# EAGLE board PCB_Ceas (EAGLE 9.7.0)
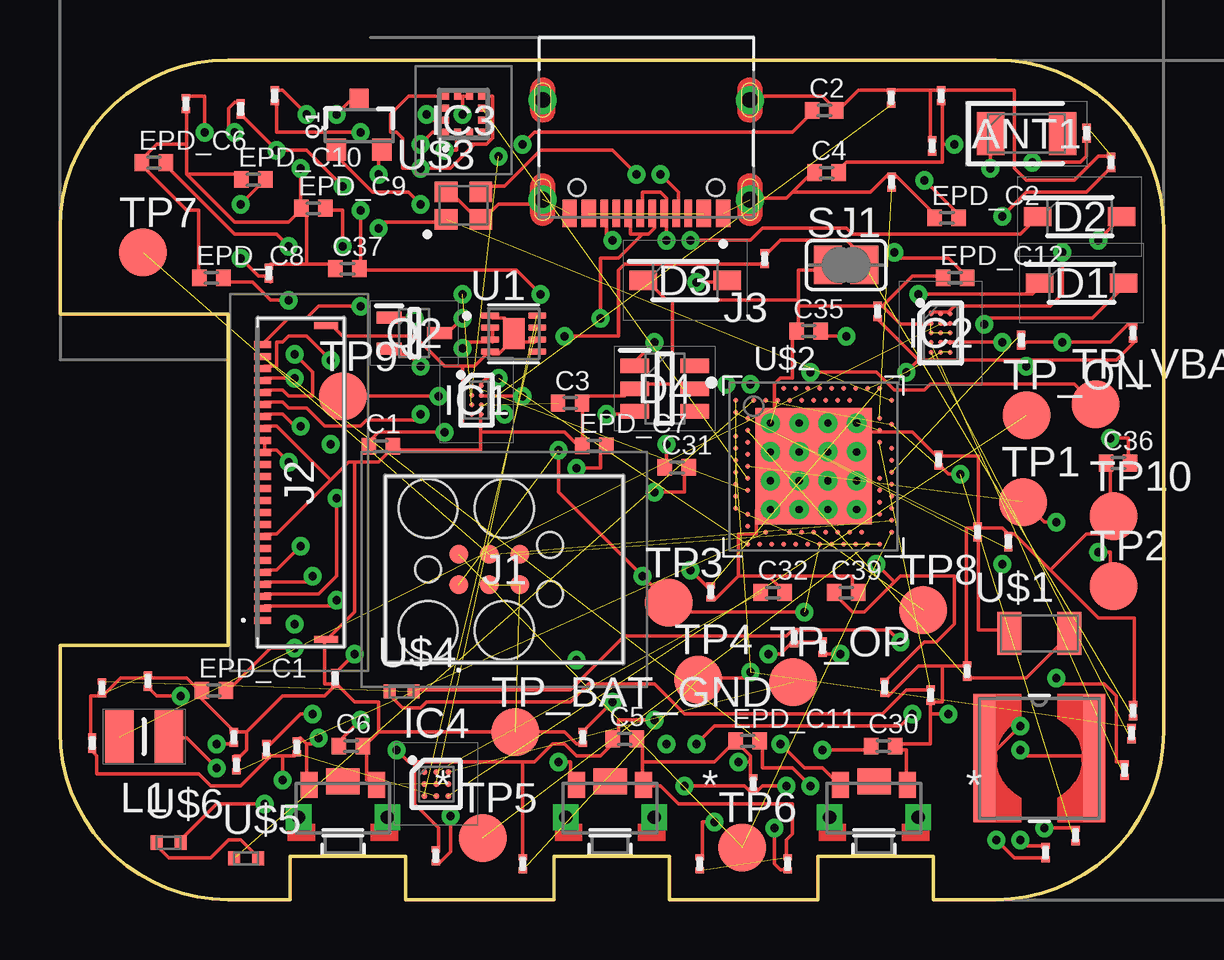
[diagram p0: board, top side]
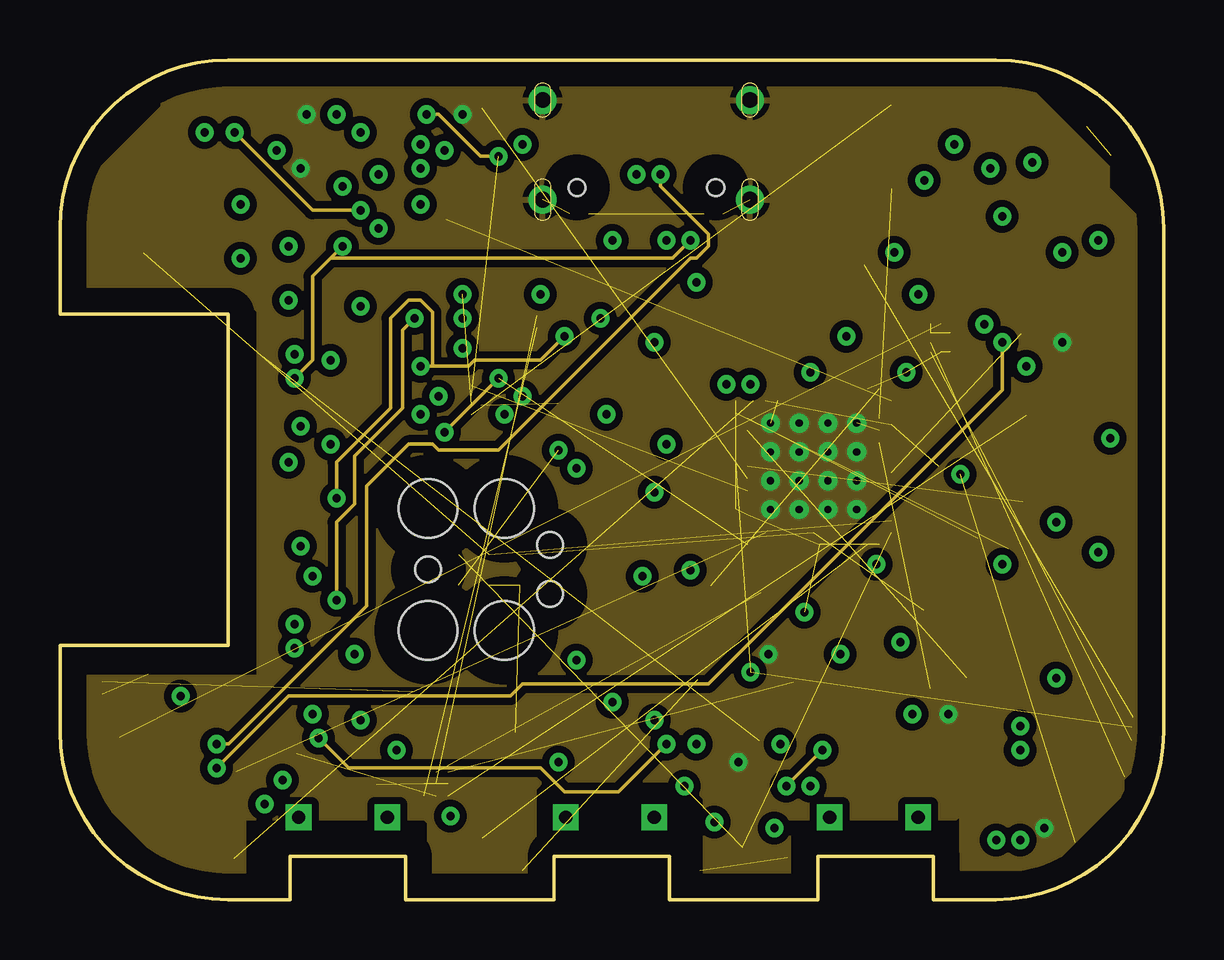
[diagram p1: board, inner layer Route2]
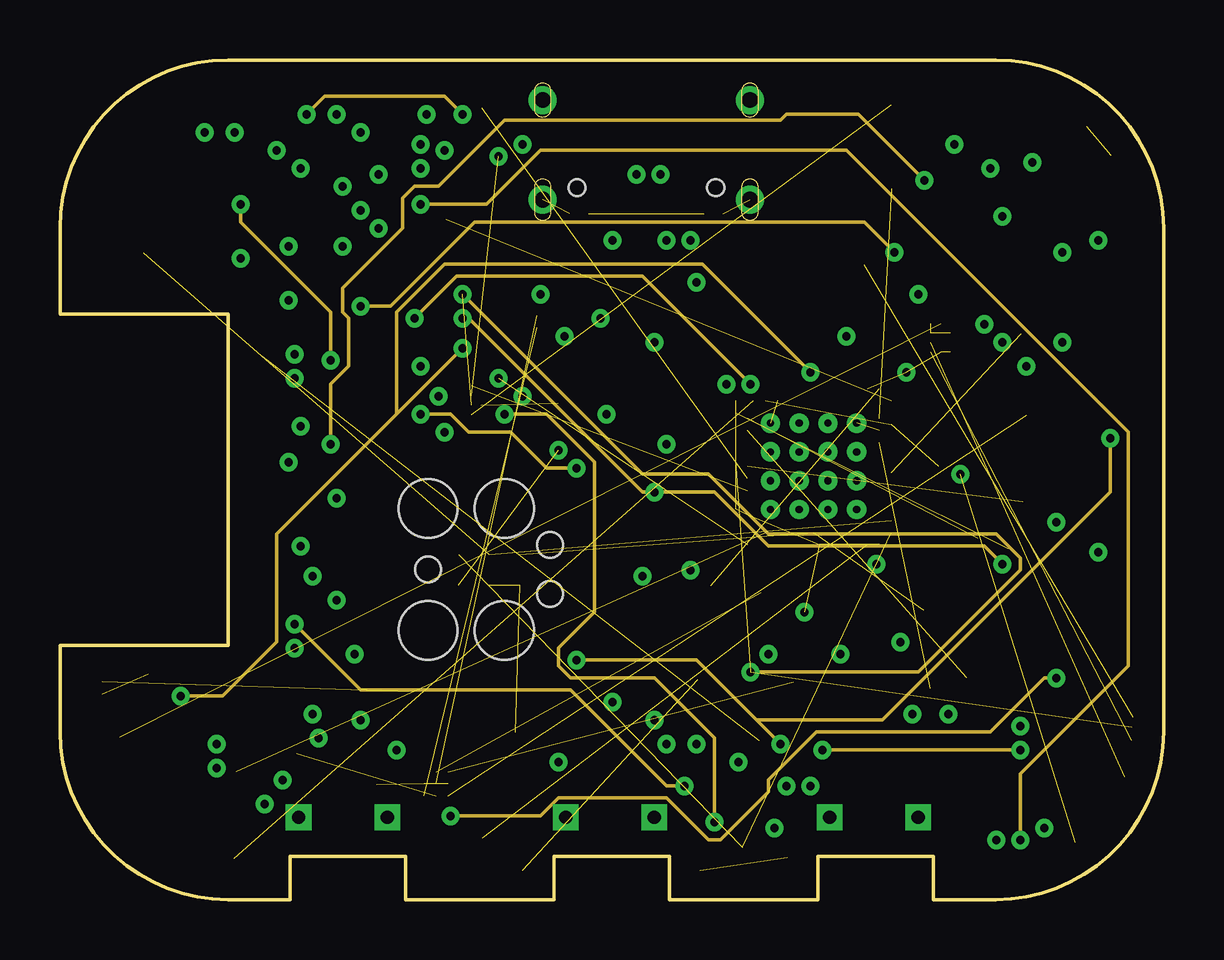
[diagram p2: board, inner layer Route15]
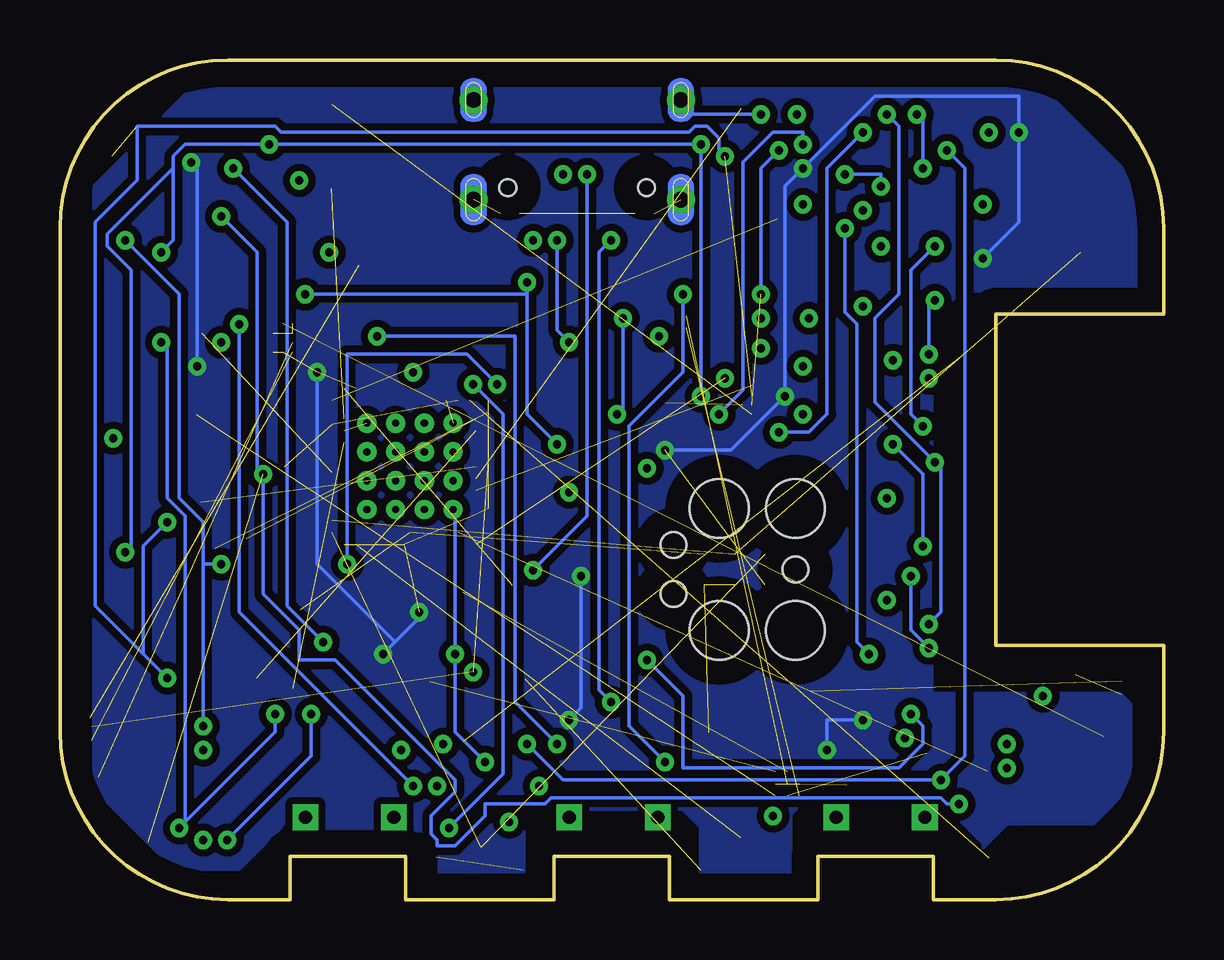
[diagram p3: board, bottom side, seen from below]

Size 46 x 35 mm. Coordinates in mm from the lower left corner, seen from the top.
Outline: 39,0 36.4,0 36.4,1.8 31.6,1.8 31.6,0 25.4,0 25.4,1.8 20.6,1.8 20.6,0 14.4,0 14.4,1.8 9.6,1.8 9.6,0 7,0 arc-90 0,7 0,10.6 7,10.6 7,24.4 0,24.4 0,28 arc-90 7,35 39,35 arc-90 46,28 46,7 arc-90 39,0
Copper layers (1+2*15+16): Top 0.035mm / dielectric 1.5mm / Route2 0.035mm / dielectric 0.15mm / Route15 0.035mm / dielectric 0.2mm / Bottom 0.035mm
Design rules "Fusion Electronics Design Rules *": minimum track width 6mil, minimum drill 0.35mm, track to track 6mil, track to pad 6mil, pad to pad 6mil, via to via 6mil, smd to smd 6mil, copper to edge 40mil, drill to drill 6mil, minimum pad ring 10mil, minimum via ring 8mil, stop-mask expansion 4mil, vias tented up to drill 9999mil, thermal gap 10mil

## Footprints (pad centres in the part's own frame; a part is rotated, then mirrored left to right if it is on the bottom)
2450AT18B100E_ANTC3216X140N = smd 1.15 x 1.8: 1 -1.5,0; 2 1.5,0
PERFECT_0402_0402 = smd 0.6 x 0.7: 1 -0.5,0; 2 0.5,0
GRM011R60J152KE01L_1_0201 = smd 0.35 x 0.25: 1 0,0.275; 2 0,-0.275
ESP32_C6_LIBRARY_5_SOD3716X135N = smd 1.15 x 0.8: 1 -1.75,0; 2 1.75,0
ESP32_C6_LIBRARY_3_SOT95P280X145-6N = smd 1.2 x 0.6: 1 -1.25,0.95; 2 -1.25,0; 3 -1.25,-0.95; 4 1.25,-0.95; 5 1.25,0; 6 1.25,0.95
BQ25180YBGR_BGA8C40P2X4_100X155X50 = smd 0.2 x 0.2: A1 -0.2,0.6; A2 0.2,0.6; B1 -0.2,0.2; B2 0.2,0.2; C1 -0.2,-0.2; C2 0.2,-0.2; D1 -0.2,-0.6; D2 0.2,-0.6
RT6160AWSC_BGA15C40P3X5_140X230X60 = smd 0.216 x 0.216: A1 -0.4,0.8; A2 0,0.8; A3 0.4,0.8; B1 -0.4,0.4; B2 0,0.4; B3 0.4,0.4; C1 -0.4,0; C2 0,0; C3 0.4,0; D1 -0.4,-0.4; D2 0,-0.4; D3 0.4,-0.4; E1 -0.4,-0.8; E2 0,-0.8; E3 0.4,-0.8
BMA423_BMA423 = smd 0.3 x 0.35: 1 -0.75,-0.775; 2 -0.25,-0.775; 3 0.25,-0.775; 4 0.75,-0.775; 7 0.75,0.775; 8 0.25,0.775; 9 -0.25,0.775; 10 -0.75,0.775 | smd 0.35 x 0.3: 5 0.775,-0.25; 6 0.775,0.25; 11 -0.775,0.25; 12 -0.775,-0.25
DRV2605YZFR_BGA9C50P3X3_144X144X62 = smd 0.25 x 0.25: A1 -0.5,0.5; A2 0,0.5; A3 0.5,0.5; B1 -0.5,0; B2 0,0; B3 0.5,0; C1 -0.5,-0.5; C2 0,-0.5; C3 0.5,-0.5
TC2030-IDC_TC2030IDC = smd 0.783 x 0.783: 1 -0.953,-0.635; 2 -0.953,0.635; 3 0.317,-0.635; 4 0.317,0.635; 5 1.588,-0.635; 6 1.588,0.635 | hole 2.451: -2.223,-2.54; -2.223,2.54; 0.952,-2.54; 0.952,2.54 | hole 1.067: -2.223,0; 2.857,-1.016; 2.857,1.016
503480-2400_5034802400 = smd 0.3 x 0.7: 1 -5.75,1.525; 2 -5.25,1.525; 3 -4.75,1.525; 4 -4.25,1.525; 5 -3.75,1.525; 6 -3.25,1.525; 7 -2.75,1.525; 8 -2.25,1.525; 9 -1.75,1.525; 10 -1.25,1.525; 11 -0.75,1.525; 12 -0.25,1.525; 13 0.25,1.525; 14 0.75,1.525; 15 1.25,1.525; 16 1.75,1.525; 17 2.25,1.525; 18 2.75,1.525; 19 3.25,1.525; 20 3.75,1.525; 21 4.25,1.525; 22 4.75,1.525; 23 5.25,1.525; 24 5.75,1.525 | smd 0.3 x 1: MP1 -6.54,-1.125; MP2 6.54,-1.125
KH-TYPE-C-16P_KINGHELM_KH-TYPE-C-16P = smd 0.6 x 1.15: A1_B12 -3.2,4.725; A4_B9 -2.4,4.725; A9_B4 2.4,4.725; A12_B1 3.2,4.725 | smd 0.3 x 1.15: A5 -1.25,4.725; A6 -0.25,4.725; A7 0.25,4.725; A8 1.25,4.725; B5 1.75,4.725; B6 0.75,4.725; B7 -0.75,4.725; B8 -1.75,4.725 | drill 0.65 pad 1.05: SH1 -4.32,0; SH2 4.32,0; SH3 -4.32,4.15; SH4 4.32,4.15 | hole 0.7: -2.89,3.65; 2.89,3.65
MLP2016SR47MT0S1_INDC2016X100N = smd 1.2 x 2.2: 1 -1.028,0; 2 1.028,0
ESP32_C6_LIBRARY_2_IND_4828-WE-TPC_WRE = smd 0.9 x 5.3: 1 -2.286,0; 2 2.286,0
ESP32_C6_LIBRARY_4_ESP32_C6_LIBRARY_4_ESP32_C6_LIBRARY_4_ESP32_C6_LIBRARY_4_ESP32_WROVER_SPARKFUN-DISCRETESEMI_SOT23-3 = smd 0.8 x 0.9: 1 -0.95,-1; 2 0.95,-1; 3 0,1.1
ESP32_C6_LIBRARY_6_SOT65P210X110-3N = smd 1.05 x 0.5: 1 -1.05,0.65; 2 -1.05,-0.65; 3 1.05,0
CPF0201D7K68C1_0201 = smd 0.35 x 0.25: 1 0,0.275; 2 0,-0.275
ESP32_C6_LIBRARY_7_JUMPER_SJ = smd 1.168 x 1.6: 1 -0.762,0; 2 0.762,0
2025-10-22_07-23-44_LIBRARY_SW_EVP-AKE31A_PAN = smd 0.711 x 1.092: 1 -1.4,-0.972; 2 1.4,-0.972 | drill 0.559 pad 0.914 square: 3 -1.848,0.381; 4 1.848,0.381 | smd 1.397 x 1.092: 5 0,-1.124
HECTOR_WATCH_1_TP20R = smd 2 x 2: TP 0,0
ESP32_C6_LIBRARY_SON50P200X200X80-9N = smd 0.76 x 0.27: 1 -0.985,0.75; 2 -0.985,0.25; 3 -0.985,-0.25; 4 -0.985,-0.75; 5 0.985,-0.75; 6 0.985,-0.25; 7 0.985,0.25; 8 0.985,0.75 | smd 0.9 x 1.3: 9 0,0
NORDIC_NRF_1_XTAL_3215_N = smd 1 x 1.8: 1 -1.25,0; 2 1.25,0
NORDIC_NRF_4_AQFN50P700X700X85_HS-74N = smd 4.85 x 4.85: P$74 0,0 | drill 0.3 pad 0.6: P$75 -1.8,1.8; P$76 -0.6,1.8; P$77 0.6,1.8; P$78 1.8,1.8; P$79 -1.8,0.6; P$80 -0.6,0.6; P$81 0.6,0.6; P$82 1.8,0.6; P$83 -1.8,-0.6; P$84 -0.6,-0.6; P$85 0.6,-0.6; P$86 1.8,-0.6; P$87 -1.8,-1.8; P$88 -0.6,-1.8; P$89 0.6,-1.8; P$90 1.8,-1.8 | smd 0.2 x 0.2: P$A8 -1.25,3.25; P$A10 -0.75,3.25; P$A12 -0.25,3.25; P$A14 0.25,3.25; P$A16 0.75,3.25; P$A18 1.25,3.25; P$A20 1.75,3.25; P$A22 2.25,3.25; P$A23 2.75,3.25; P$AA24 3.25,-2.25; P$AB2 -2.75,-2.5; P$AC5 -2,-2.75; P$AC9 -1,-2.75; P$AC11 -0.5,-2.75; P$AC13 0,-2.75; P$AC15 0.5,-2.75; P$AC17 1,-2.75; P$AC19 1.5,-2.75; P$AC21 2,-2.75; P$AC24 3.25,-2.75; P$AD2 -2.75,-3.25; P$AD4 -2.25,-3.25; P$AD6 -1.75,-3.25; P$AD8 -1.25,-3.25; P$AD10 -0.75,-3.25; P$AD12 -0.25,-3.25; P$AD14 0.25,-3.25; P$AD16 0.75,-3.25; P$AD18 1.25,-3.25; P$AD20 1.75,-3.25; P$AD22 2.25,-3.25; P$AD23 2.75,-3.25; P$B1 -3.25,2.75; P$B3 -2.5,2.75; P$B5 -2,2.75; P$B7 -1.5,2.75; P$B9 -1,2.75; P$B11 -0.5,2.75; P$B13 0,2.75; P$B15 0.5,2.75; P$B17 1,2.75; P$B19 1.5,2.75; P$B24 3.25,2.75; P$C1 -3.25,2.25; P$D2 -2.75,2; P$D23 2.75,2; P$E24 3.25,1.75; P$F2 -2.75,1.5; P$F23 2.75,1.5; P$G1 -3.25,1.25; P$H2 -2.75,1; P$H23 2.75,1; P$J1 -3.25,0.75; P$J24 3.25,0.75; P$K2 -2.75,0.5; P$L1 -3.25,0.25; P$L24 3.25,0.25; P$M2 -2.75,0; P$N1 -3.25,-0.25; P$N24 3.25,-0.25; P$P2 -2.75,-0.5; P$P23 2.75,-0.5; P$R1 -3.25,-0.75; P$R24 3.25,-0.75; P$T2 -2.75,-1; P$T23 2.75,-1; P$U1 -3.25,-1.25; P$U24 3.25,-1.25; P$V23 2.75,-1.5; P$W1 -3.25,-1.75; P$W24 3.25,-1.75; P$Y2 -2.75,-2; P$Y23 2.75,-2
NORDIC_NRF_BT-XTAL_2016_N = smd 0.95 x 0.85: 1 -0.725,-0.575; 2 0.725,-0.575; 3 0.725,0.575; 4 -0.725,0.575
NORDIC_NRF_2_RESC0402_L = smd 0.5 x 0.6: 1 -0.5,0; 2 0.5,0

## Placement (x,y rotation side)
ANT1  2450AT18B100E_2450AT18B100E  [2450AT18B100E_ANTC3216X140N]  40.29,31.93 0 top
C1  1uF  [PERFECT_0402_0402]  13.37,18.9 0 top
C2  10uF  [PERFECT_0402_0402]  31.86,32.9 0 top
C3  1uF  [PERFECT_0402_0402]  21.26,20.7 0 top
C4  10uF  [PERFECT_0402_0402]  31.95,30.3 0 top
C5  22uF  [PERFECT_0402_0402]  23.54,6.7 0 top
C6  22uF  [PERFECT_0402_0402]  12.13,6.4 0 top
C7  0.1uF  [GRM011R60J152KE01L_1_0201]  36.73,33.51 0 top
C8  100nF  [GRM011R60J152KE01L_1_0201]  31.79,10.52 0 top
C9  12pF  [GRM011R60J152KE01L_1_0201]  38.25,15.32 0 top
C10  12pF  [GRM011R60J152KE01L_1_0201]  37.81,9.52 0 top
C11  12pF  [GRM011R60J152KE01L_1_0201]  11.47,9.22 0 top
C12  12pF  [GRM011R60J152KE01L_1_0201]  27.13,12.82 0 top
C13  1pF  [GRM011R60J152KE01L_1_0201]  36.29,8.52 0 top
C14  N.C.  [GRM011R60J152KE01L_1_0201]  1.75,8.82 0 top
C15  1pF  [GRM011R60J152KE01L_1_0201]  30.61,10.92 0 top
C16  820pF  [GRM011R60J152KE01L_1_0201]  40.07,23.32 0 top
C17  100nF  [GRM011R60J152KE01L_1_0201]  5.25,33.18 0 top
C18  100nF  [GRM011R60J152KE01L_1_0201]  44.73,23.62 0 top
C19  4.7uF  [GRM011R60J152KE01L_1_0201]  8.95,33.51 0 top
C20  4.7uF  [GRM011R60J152KE01L_1_0201]  7.35,5.62 0 top
C21  4.7uF  [GRM011R60J152KE01L_1_0201]  42.8,31.95 0 top
C22  100nF  [GRM011R60J152KE01L_1_0201]  39.53,14.92 0 top
C23  4.7uF  [GRM011R60J152KE01L_1_0201]  34.09,24.52 0 top
C24  N.C.  [GRM011R60J152KE01L_1_0201]  36.35,31.42 0 top
C25  100nF  [GRM011R60J152KE01L_1_0201]  8.71,26.12 0 top
C26  100pF  [GRM011R60J152KE01L_1_0201]  34.67,29.91 0 top
C27  N.C.  [GRM011R60J152KE01L_1_0201]  36.63,18.32 0 top
C28  1uF  [GRM011R60J152KE01L_1_0201]  43.82,30.73 0 top
C29  47nF  [GRM011R60J152KE01L_1_0201]  42.33,2.67 0 top
C30  10uF  [PERFECT_0402_0402]  34.32,6.4 0 top
C31  4.7uF/25V  [PERFECT_0402_0402]  25.71,18.02 0 top
C32  1uF  [PERFECT_0402_0402]  29.71,12.8 0 top
C33  0.1uF  [GRM011R60J152KE01L_1_0201]  1.34,6.52 0 top
C34  0.1uF  [GRM011R60J152KE01L_1_0201]  3.67,9.11 0 top
C35  1uF  [PERFECT_0402_0402]  31.2,23.7 0 top
C36  1uF  [PERFECT_0402_0402]  44.11,18.2 0 top
C37  1uF  [PERFECT_0402_0402]  11.98,26.3 0 top
C38  0.1uF  [GRM011R60J152KE01L_1_0201]  34.37,8.85 0 top
C39  4.7uF  [PERFECT_0402_0402]  32.77,12.8 0 top
D1  ESP32_C6_LIBRARY_5_MBR0530  [ESP32_C6_LIBRARY_5_SOD3716X135N]  42.58,25.7 0 top
D2  ESP32_C6_LIBRARY_5_MBR0530  [ESP32_C6_LIBRARY_5_SOD3716X135N]  42.51,28.47 0 top
D3  ESP32_C6_LIBRARY_5_MBR0530  [ESP32_C6_LIBRARY_5_SOD3716X135N]  26.06,25.81 0 top
D4  ESP32_C6_LIBRARY_3_USBLC6-2SC6Y  [ESP32_C6_LIBRARY_3_SOT95P280X145-6N]  25.21,21.3 0 top
EPD_C1  1uF/50V  [PERFECT_0402_0402]  6.41,8.72 0 top
EPD_C2  1uF/50V  [PERFECT_0402_0402]  36.96,28.42 0 top
EPD_C5  0.1uF/50V  [GRM011R60J152KE01L_1_0201]  28.89,4.82 0 top
EPD_C6  1uF/50V  [PERFECT_0402_0402]  3.91,30.72 0 top
EPD_C7  1uF/50V  [PERFECT_0402_0402]  22.26,18.92 0 top
EPD_C8  1uF/50V  [PERFECT_0402_0402]  6.31,25.92 0 top
EPD_C9  1uF/50V  [PERFECT_0402_0402]  10.56,28.82 0 top
EPD_C10  1uF/50V  [PERFECT_0402_0402]  8.06,30.02 0 top
EPD_C11  1uF/50V  [PERFECT_0402_0402]  28.66,6.62 0 top
EPD_C12  1uF/50V  [PERFECT_0402_0402]  37.31,25.92 0 top
IC1  BQ25180YBGR_BQ25180YBGR  [BQ25180YBGR_BGA8C40P2X4_100X155X50]  17.36,20.82 0 top
IC2  RT6160AWSC_RT6160AWSC  [RT6160AWSC_BGA15C40P3X5_140X230X60]  36.71,23.62 0 top
IC3  BMA423_BMA423  [BMA423_BMA423]  16.82,32.74 0 top
IC4  DRV2605YZFR_DRV2605YZFR  [DRV2605YZFR_BGA9C50P3X3_144X144X62]  15.68,4.82 0 top
J1  TC2030-IDC_TC2030-IDC  [TC2030-IDC_TC2030IDC]  17.57,13.76 0 top
J2  503480-2400_503480-2400  [503480-2400_5034802400]  9.97,17.39 90 top
J3  KH-TYPE-C-16P_KH-TYPE-C-16P  [KH-TYPE-C-16P_KINGHELM_KH-TYPE-C-16P]  24.44,33.33 180 top
L1  MLP2016SR47MT0S1_FTC252012SR47MBCA  [MLP2016SR47MT0S1_INDC2016X100N]  3.51,6.79 0 top
L2  68uH  [ESP32_C6_LIBRARY_2_IND_4828-WE-TPC_WRE]  40.82,5.89 0 top
Q1  20V/4.2A/52mΩ/1.4W  [ESP32_C6_LIBRARY_4_ESP32_C6_LIBRARY_4_ESP32_C6_LIBRARY_4_ESP32_C6_LIBRARY_4_ESP32_WROVER_SPARKFUN-DISCRETESEMI_SOT23-3]  12.47,32.26 0 top
Q2  ESP32_C6_LIBRARY_6_SI1308EDL-T1-GE3  [ESP32_C6_LIBRARY_6_SOT65P210X110-3N]  14.77,23.61 0 top
R1  10k  [CPF0201D7K68C1_0201]  34.65,33.42 0 top
R2  0  [CPF0201D7K68C1_0201]  44.38,5.4 0 top
R3  0  [CPF0201D7K68C1_0201]  44.67,6.92 0 top
R4  3K3  [CPF0201D7K68C1_0201]  15.67,1.82 0 top
R5  3K3  [CPF0201D7K68C1_0201]  19.29,1.49 0 top
R6  0  [CPF0201D7K68C1_0201]  26.67,1.49 0 top
R7  10K  [CPF0201D7K68C1_0201]  30.33,1.49 0 top
R8  0.47K  [CPF0201D7K68C1_0201]  29.37,26.72 0 top
R9  10K  [CPF0201D7K68C1_0201]  41.08,1.96 0 top
R10  2.2K  [CPF0201D7K68C1_0201]  44.73,7.87 0 top
R11  10K  [CPF0201D7K68C1_0201]  8.61,6.26 0 top
R12  10K  [CPF0201D7K68C1_0201]  9.87,6.36 0 top
R13  10K  [CPF0201D7K68C1_0201]  7.53,32.96 0 top
R14  5K1  [CPF0201D7K68C1_0201]  21.79,6.76 0 top
R15  5K1  [CPF0201D7K68C1_0201]  7.25,6.76 0 top
SJ1  [ESP32_C6_LIBRARY_7_JUMPER_SJ]  32.77,26.45 0 top
SW_DN  2025-10-22_07-23-44_LIBRARY_EVP-AKE31ASW_EVP-AKE31A_PAN  [2025-10-22_07-23-44_LIBRARY_SW_EVP-AKE31A_PAN]  22.93,3.81 180 top
SW_ENT  2025-10-22_07-23-44_LIBRARY_EVP-AKE31ASW_EVP-AKE31A_PAN  [2025-10-22_07-23-44_LIBRARY_SW_EVP-AKE31A_PAN]  33.93,3.81 180 top
SW_UP  2025-10-22_07-23-44_LIBRARY_EVP-AKE31ASW_EVP-AKE31A_PAN  [2025-10-22_07-23-44_LIBRARY_SW_EVP-AKE31A_PAN]  11.79,3.81 180 top
TP1  HECTOR_WATCH_1_TPTP20R  [HECTOR_WATCH_1_TP20R]  40.14,16.57 0 top
TP2  HECTOR_WATCH_1_TPTP20R  [HECTOR_WATCH_1_TP20R]  43.91,13.07 0 top
TP3  HECTOR_WATCH_1_TPTP20R  [HECTOR_WATCH_1_TP20R]  25.38,12.37 0 top
TP4  HECTOR_WATCH_1_TPTP20R  [HECTOR_WATCH_1_TP20R]  26.6,9.17 0 top
TP5  HECTOR_WATCH_1_TPTP20R  [HECTOR_WATCH_1_TP20R]  17.62,2.57 0 top
TP6  HECTOR_WATCH_1_TPTP20R  [HECTOR_WATCH_1_TP20R]  28.44,2.17 0 top
TP7  HECTOR_WATCH_1_TPTP20R  [HECTOR_WATCH_1_TP20R]  3.46,26.97 0 top
TP8  HECTOR_WATCH_1_TPTP20R  [HECTOR_WATCH_1_TP20R]  35.98,12.07 0 top
TP9  HECTOR_WATCH_1_TPTP20R  [HECTOR_WATCH_1_TP20R]  11.8,20.97 0 top
TP10  HECTOR_WATCH_1_TPTP20R  [HECTOR_WATCH_1_TP20R]  43.91,15.97 0 top
TP_BAT_GND  HECTOR_WATCH_1_TPTP20R  [HECTOR_WATCH_1_TP20R]  18.97,6.97 0 top
TP_ON  HECTOR_WATCH_1_TPTP20R  [HECTOR_WATCH_1_TP20R]  40.3,20.2 0 top
TP_OP  HECTOR_WATCH_1_TPTP20R  [HECTOR_WATCH_1_TP20R]  30.57,9.07 0 top
TP_VBAT  HECTOR_WATCH_1_TPTP20R  [HECTOR_WATCH_1_TP20R]  43.16,20.65 0 top
U1  ESP32_C6_LIBRARY_MAX17048G+T10  [ESP32_C6_LIBRARY_SON50P200X200X80-9N]  18.91,23.59 0 top
U$1  32.768kHz  [NORDIC_NRF_1_XTAL_3215_N]  40.82,11.09 0 top
U$2  NORDIC_NRF_4_NRF52840_QF  [NORDIC_NRF_4_AQFN50P700X700X85_HS-74N]  31.41,18.06 0 top
U$3  32MHz  [NORDIC_NRF_BT-XTAL_2016_N]  16.82,28.93 0 top
U$4  3.9nH  [NORDIC_NRF_2_RESC0402_L]  14.23,8.68 0 top
U$5  10uH  [NORDIC_NRF_2_RESC0402_L]  7.76,1.72 0 top
U$6  15nH  [NORDIC_NRF_2_RESC0402_L]  4.53,2.37 0 top

## Library data of the parts
ANT1 = InkTime_v5; ARROW_PART_NUMBER: 2450AT18B100E; ARROW_PRICE-STOCK: https://www.arrow.com/en/products/2450at18b100e/johanson-dielectrics?utm_currency=USD&region=nac; DESCRIPTION: Antennas 2.45GHz ANTENNA; HEIGHT: 1.4mm; MANUFACTURER_NAME: JOHANSON TECHNOLOGY; MANUFACTURER_PART_NUMBER: 2450AT18B100E; MOUSER_PART_NUMBER: 609-2450AT18B100E; MOUSER_PRICE-STOCK: https://www.mouser.co.uk/ProductDetail/Johanson-Technology/2450AT18B100E?qs=yCnrNFeXz%252Bh5MFsFIXGZGA%3D%3D
C1-C39 EPD_C1 EPD_C2 EPD_C5-EPD_C12 R1-R15 SJ1 TP1-TP10 TP_BAT_GND TP_ON TP_OP TP_VBAT U$1-U$6 = InkTime_v5
D1-D3 = InkTime_v5; AVAILABILITY: In Stock; CHECK_PRICES: https://www.snapeda.com/parts/MBR0530/Onsemi/view-part/?ref=eda; DESCRIPTION: Diode Schottky 30 V 500mA Surface Mount SOD-123; MF: ON Semiconductor; MP: MBR0530; PACKAGE: SOD-123-2 ON Semiconductor; PRICE: None; PURCHASE-URL: https://www.snapeda.com/api/url_track_click_mouser/?unipart_id=179458&manufacturer=ON Semiconductor&part_name=MBR0530&search_term=None; SNAPEDA_LINK: https://www.snapeda.com/parts/MBR0530/Onsemi/view-part/?ref=snap
D4 = InkTime_v5; AVAILABILITY: In Stock; CHECK_PRICES: https://www.snapeda.com/parts/USBLC6-2SC6Y/STMicroelectronics/view-part/?ref=eda; DESCRIPTION: 17V Clamp 5A (8/20µs) Ipp Tvs Diode Surface Mount SOT-23-6; MF: STMicroelectronics; MP: USBLC6-2SC6Y; PACKAGE: SOT-23-6 STMicroelectronics; PRICE: None; SNAPEDA_LINK: https://www.snapeda.com/parts/USBLC6-2SC6Y/STMicroelectronics/view-part/?ref=snap
IC1 = InkTime_v5; ARROW_PART_NUMBER: BQ25180YBGR; ARROW_PRICE-STOCK: https://www.arrow.com/en/products/bq25180ybgr/texas-instruments?utm_currency=USD&region=nac; DESCRIPTION: Charger IC Lithium Ion/Polymer, Lithium Iron Phosphate 8-DSBGA (1.6x1.1); HEIGHT: 0.5mm; MANUFACTURER_NAME: Texas Instruments; MANUFACTURER_PART_NUMBER: BQ25180YBGR; MOUSER_PART_NUMBER: 595-BQ25180YBGR; MOUSER_PRICE-STOCK: https://www.mouser.co.uk/ProductDetail/Texas-Instruments/BQ25180YBGR?qs=doiCPypUmgEWjAK%252BJAX6Tw%3D%3D
IC2 = InkTime_v5; DESCRIPTION: Buck-Boost Regulator Positive Output Step-Up/Step-Down I2C DC-DC Controller IC 15-WL-CSP (BSC) (1.4x2.3); HEIGHT: 0.6mm; MANUFACTURER_NAME: RICHTEK; MANUFACTURER_PART_NUMBER: RT6160AWSC; MOUSER_PART_NUMBER: 835-RT6160AWSC; MOUSER_PRICE-STOCK: https://www.mouser.co.uk/ProductDetail/Richtek/RT6160AWSC?qs=amGC7iS6iy%2FLd9PSoixZXQ%3D%3D
IC3 = InkTime_v5; ARROW_PART_NUMBER: BMA423; ARROW_PRICE-STOCK: https://www.arrow.com/en/products/bma423/bosch; DESCRIPTION: Accelerometers Triaxial low-g 12bit Acceleration Sensor; HEIGHT: 1mm; MANUFACTURER_NAME: BOSCH; MANUFACTURER_PART_NUMBER: BMA423; MOUSER_PART_NUMBER: 262-BMA423; MOUSER_PRICE-STOCK: https://www.mouser.co.uk/ProductDetail/Bosch-Sensortec/BMA423?qs=HXFqYaX1Q2xC%252BSgeGoX3mg%3D%3D
IC4 = InkTime_v5; ARROW_PART_NUMBER: DRV2605YZFR; ARROW_PRICE-STOCK: https://www.arrow.com/en/products/drv2605yzfr/texas-instruments?region=nac; DESCRIPTION: Haptic Driver for ERM/LRA with Built-In Library and Smart Loop Architecture; HEIGHT: 0.625mm; MANUFACTURER_NAME: Texas Instruments; MANUFACTURER_PART_NUMBER: DRV2605YZFR
J1 = InkTime_v5; DESCRIPTION: CABLE ADAPTER 6 POS; HEIGHT: 19mm; MANUFACTURER_NAME: Tag Connect; MANUFACTURER_PART_NUMBER: TC2030-IDC
J2 = InkTime_v5; DESCRIPTION: FFC & FPC Connectors 0.5mm FPC RA SMT Dual Contact 24Ckt; HEIGHT: 1.87mm; MANUFACTURER_NAME: Molex; MANUFACTURER_PART_NUMBER: 503480-2400; MOUSER_PART_NUMBER: 538-503480-2400; MOUSER_PRICE-STOCK: https://www.mouser.co.uk/ProductDetail/Molex/503480-2400?qs=OAhjpuo3Vu7efIoxFh9AOw%3D%3D
J3 = InkTime_v5; AVAILABILITY: Not in stock; CHECK_PRICES: https://www.snapeda.com/parts/KH-TYPE-C-16P/Kinghelm/view-part/?ref=eda; MF: kinghelm; MP: KH-TYPE-C-16P; PACKAGE: None; PRICE: None; SNAPEDA_LINK: https://www.snapeda.com/parts/KH-TYPE-C-16P/Kinghelm/view-part/?ref=snap
L1 = InkTime_v5; DESCRIPTION: SMD / SMT Inductors (Coils), L=0.47?H, L x W x T :; HEIGHT: 1mm; JLCPCB: https://jlcpcb.com/partdetail/6763488-FTC252012SR47MBCA/C5832368; MANUFACTURER_NAME: TDK; MANUFACTURER_PART_NUMBER: FTC252012SR47MBCA
L2 = InkTime_v5; COPYRIGHT: Copyright (C) 2024 Ultra Librarian. All rights reserved.; MANUFACTURER_PART_NUMBER: 744043680; MFR_NAME: Wurth Electronics
Q1 = InkTime_v5; PROD_ID: TRAN-14388
Q2 = InkTime_v5; AVAILABILITY: In Stock; CHECK_PRICES: https://www.snapeda.com/parts/SI1308EDL-T1-GE3/Vishay+Siliconix/view-part/?ref=eda; DESCRIPTION: Si1308EDL-T1-GE3 N-channel MOSFET Transistor, 1.5 A, 30 V, 3-Pin SC-70 | Siliconix / Vishay SI1308EDL-T1-GE3; MF: Vishay Siliconix; MP: SI1308EDL-T1-GE3; PACKAGE: SOT-323 Vishay Semiconductor; PRICE: None; PURCHASE-URL: https://www.snapeda.com/api/url_track_click_mouser/?unipart_id=274603&manufacturer=Vishay Siliconix&part_name=SI1308EDL-T1-GE3&search_term=None; SNAPEDA_LINK: https://www.snapeda.com/parts/SI1308EDL-T1-GE3/Vishay+Siliconix/view-part/?ref=snap
SW_DN SW_ENT SW_UP = InkTime_v5; COPYRIGHT: Copyright (C) 2025 Ultra Librarian. All rights reserved.; DIGI-KEY_PART_NUMBER_1: P123437TR-ND; DIGI-KEY_PART_NUMBER_2: P123437CT-ND; DIGI-KEY_PART_NUMBER_3: P123437DKR-ND; MANUFACTURER_NAME: Panasonic; MANUFACTURER_PART_NUMBER: EVP-AKE31A
U1 = InkTime_v5; AVAILABILITY: In Stock; CHECK_PRICES: https://www.snapeda.com/parts/MAX17048G+T10/Analog+Devices/view-part/?ref=eda; DESCRIPTION: 3µA 1-Cell/2-Cell Fuel Gauge with ModelGauge; MF: Analog Devices; MP: MAX17048G+T10; PACKAGE: TDFN-8 Maxim; PRICE: None; PURCHASE-URL: https://www.snapeda.com/api/url_track_click_mouser/?unipart_id=329239&manufacturer=Analog Devices&part_name=MAX17048G+T10&search_term=None; SNAPEDA_LINK: https://www.snapeda.com/parts/MAX17048G+T10/Analog+Devices/view-part/?ref=snap

## Nets
3V3/1.7D: C33.2 IC4.C2 Q1.2 R9.2 R11.2 R12.2 R13.2
3V3/2.4A: C5.1 C6.1 C8.2 C17.1 C18.2 C21.2 C23.2 C25.2 IC2.E2 IC2.E3 IC3.3 IC3.7 IC3.10 J1.1 R4.1 R5.1 TP3.TP TP9.TP U$2.P$A22 U$2.P$AD14 U$2.P$AD23 U$2.P$B1 U$2.P$W1 U$2.P$Y2
3V3/2.4A1: C22.2 U$2.P$C1
3V3/2.4A2: C24.2
3V3/2.4A3: C26.2 U$2.P$D23
3V3/2.4A4: C27.2 C28.2 C29.2 U$2.P$B5 U$2.P$E24 U$6.2
ALERT/1.6C: U1.5
ALERT/2.5C: U$2.P$J24
D+/1.5D: D4.4
D+/2.7D: U$2.P$AD6
D-/1.5D: D4.6
D-/2.7D: U$2.P$AD4
DN: D4.1 J3.A7 J3.B7
DP: D4.3 J3.A6 J3.B6
EPD_3V3: C30.1 EPD_C5.2 J2.15 J2.16 L2.2 Q1.3
EPD_BUSY/1.5D: J2.9
EPD_BUSY/2.2D: U$2.P$AD12
EPD_CS/1.4C: J2.12
EPD_CS/2.2D: U$2.P$K2
EPD_DC/1.5D: J2.11
EPD_DC/2.2D: U$2.P$AD10
EPD_RST/1.5D: J2.10
EPD_RST/2.2D: U$2.P$AC11
GDR: J2.2 Q2.1 R7.2
GND: C1.2 C2.2 C3.2 C4.1 C5.2 C6.2 C7.1 C8.1 C9.1 C10.1 C11.2 C12.2 C13.2 C14.2 C15.2 C16.2 C17.2 C18.1 C19.1 C20.1 C21.1 C22.1 C23.1 C24.1 C25.1 C26.1 C27.1 C28.1 C29.1 C30.2 C32.2 C33.1 C34.1 C35.1 C36.1 C37.1 C38.2 C39.2 D3.1 D4.2 EPD_C1.1 EPD_C2.1 EPD_C5.1 EPD_C6.1 EPD_C7.1 EPD_C8.1 EPD_C9.1 EPD_C10.1 EPD_C11.1 EPD_C12.1 IC1.D2 IC2.B1 IC2.C1 IC2.C2 IC2.C3 IC3.8 IC3.9 IC4.B1 IC4.B3 J1.3 J1.5 J2.8 J2.17 J2.MP1 J2.MP2 J3.A1_B12 J3.A12_B1 J3.SH1 J3.SH2 J3.SH3 J3.SH4 R1.1 R6.2 R7.1 R10.1 R14.2 R15.1 SJ1.1 SW_DN.1 SW_ENT.1 SW_UP.1 TP10.TP TP_BAT_GND.TP U1.1 U1.4 U1.6 U1.9 U$2.P$74 U$2.P$75 U$2.P$76 U$2.P$77 U$2.P$78 U$2.P$79 U$2.P$80 U$2.P$81 U$2.P$82 U$2.P$83 U$2.P$84 U$2.P$85 U$2.P$86 U$2.P$87 U$2.P$88 U$2.P$89 U$2.P$90 U$2.P$B7 U$2.P$F23 U$3.2 U$3.4
HAPTIC_EN/1.4C: IC4.A1
HAPTIC_EN/2.6A: U$2.P$U1
IMU_INT1: U$2.P$N1
IMU_INT2: IC3.6 U$2.P$P2
LX1: IC2.B2 IC2.B3 L1.1
LX2: IC2.D2 IC2.D3 L1.2
MOSI/1.5B: J2.14
MOSI/2.2D: U$2.P$B13
N$1: IC2.D1 R2.2
N$2: IC3.1 R6.1
N$3: IC1.D1 R1.2
N$4: IC2.E1 R3.2
N$5: U$5.2 U$6.1
N$6: IC3.5
N$7: EPD_C2.2 J2.5
N$8: ANT1.1 C14.1 C15.1 U$4.2
N$9: C31.2 D2.2 L2.1 Q2.3
N$10: C13.1 U$2.P$H23 U$4.1
N$11: C31.1 D1.1 D3.2
N$12: EPD_C7.2 J2.19
N$13: EPD_C6.2 J2.18
N$14: C32.1 IC4.A2
N$15: C11.1 U$2.P$B24 U$3.1
N$16: C12.1 U$2.P$A23 U$3.3
N$17: EPD_C12.2 J2.24
N$18: R8.1 R10.2 SJ1.2
N$19: C16.1 U$2.P$N24
N$20: EPD_C1.2 J2.4
N$21: U$2.P$B3 U$5.1
N$22: EPD_C8.2 J2.20
N$23: C35.2 R12.1 SW_UP.2
N$24: EPD_C10.2 J2.22
N$25: C36.2 R11.1 SW_ENT.2
N$26: C37.2 R13.1 SW_DN.2
N$27: J3.B5 R14.1
N$30: J3.A4_B9 J3.A9_B4
N$34: U$2.P$A18
N$36: J3.A5 R15.2
OUT+: IC4.A3 TP_OP.TP
OUT-: IC4.C3 TP_ON.TP
P0.00/XL1: C9.2 U$1.1 U$2.P$D2
P0.04: U$2.P$J1
P0.09: U$2.P$L24
P0.13/2.6C: U$2.P$AD8
P0.14/2.7C: U$2.P$AC9
P0.19: U$2.P$AC15
P0.20: U$2.P$AD16
P0.21: U$2.P$AC17
P0.22: U$2.P$AD18
P0.23: U$2.P$AC19
P0.24: U$2.P$AD20
P0.25: U$2.P$AC21
P0.26: U$2.P$G1
P0.27: U$2.P$H2
P0.28: U$2.P$B11
P0.29: U$2.P$A10
P0.30: U$2.P$B9
P0.31: U$2.P$A8
P1.01/1.6C: Q1.1 R9.1
P1.01/2.4B: U$2.P$Y23
P1.02/2.8C: U$2.P$W24
P1.03: U$2.P$V23
P1.04: U$2.P$U24
P1.05: U$2.P$T23
P1.06: U$2.P$R24
P1.07: U$2.P$P23
P1.09: U$2.P$R1
P1.10: U$2.P$A20
P1.11: U$2.P$B19
P1.12: U$2.P$B17
P1.13: U$2.P$A16
P1.14: U$2.P$B15
P1.15: U$2.P$A14
P.01/XL2: C10.2 U$1.2 U$2.P$F2
PMIC_INT: IC1.A1 U$2.P$T2
PREVGH: D2.1 EPD_C9.2 J2.21
PREVGL: D1.2 EPD_C11.2 J2.23
RESE: J2.3 Q2.2 R8.2
RESET: J1.6 TP8.TP U$2.P$AC13
SCK/1.5B: J2.13
SCK/2.2D: U$2.P$A12
SCL/1.4C: IC4.C1 U1.7
SCL/2.4C: IC1.B1 IC3.12 R2.1 R4.2 TP1.TP U$2.P$M2
SDA/1.4C: IC4.B2 U1.8
SDA/2.4C: IC1.C1 IC3.2 R3.1 R5.2 TP4.TP U$2.P$L1
SWDCLK: J1.4 TP7.TP U$2.P$AA24
SWDIO: J1.2 TP6.TP U$2.P$AC24
SWO: TP5.TP U$2.P$AD22
VBAT/1.2A: C34.2 TP_VBAT.TP U1.2 U1.3
VBAT/2.5C: C3.1 IC1.C2
VBUS/1.5D: C38.1 C39.1 D4.5
VBUS/2.6D: C1.1 C19.2 IC1.A2 U$2.P$AD2
VBUS/2.6D1: C20.2 U$2.P$AC5
VREG: C2.1 C4.2 C7.2 IC1.B2 IC2.A1 IC2.A2 IC2.A3 TP2.TP

## Tracks (layer width: path | path; a pad name or v marks a point on that pad's centre or on a via)
3V3/1.7D  (via drill 0.35)  (1 unrouted)
  Top 0.152: 9.28,5.98 9.78,5.98 R12.2 | 9.28,5.98 8.78,5.98 | 8.78,5.98 7.53,4.73 6.28,4.73 5.78,5.23 1.53,5.23 1.53,5.98 1.28,6.23 C33.2 | 8.78,5.98 R11.2 | v39.03,2.48 39.78,1.73 41.03,1.73 R9.2 | v35.53,7.73 35.03,7.23 27.28,7.23 v26.53,6.48 | 9.28,5.98 v9.28,4.98 | R13.2 7.53,32.73 v9.03,31.23 10.28,31.23 v11.78,29.73 | v13.28,30.23 13.28,31.23 Q1.2
  Bottom 0.152: v39.03,2.48 35.53,5.98 v35.53,7.73 | v26.53,6.48 25.03,4.98 v9.28,4.98 8.28,5.98 8.28,30.48 v9.03,31.23 | v13.28,30.23 11.78,30.23 v11.78,29.73
3V3/2.4A  (via drill 0.35)  (9 unrouted)
  Top 0.152: 17.28,31.48 17.78,31.48 18.03,31.73 18.03,33.48 17.53,33.48 IC3.7 | 17.28,31.48 17.03,31.48 17.03,31.98 IC3.3 | 17.28,31.48 16.28,30.48 v15.03,30.48 14.28,30.48 14.28,31.73 14.03,31.98 13.78,31.98 13.78,32.73 14.53,33.48 16.03,33.48 IC3.10 | v7.53,26.73 8.28,25.98 8.53,25.98 8.78,25.73 C25.2 | v6.03,31.98 6.03,33.48 5.28,33.48 C17.1 | v15.78,20.98 12.03,20.98 TP9.TP | 19.28,5.73 19.28,1.73 R5.1 | 19.28,5.73 19.78,5.73 20.53,6.48 21.03,6.48 21.53,5.98 22.53,5.98 23.03,6.48 C5.1 23.28,6.73 23.28,7.48 v24.78,7.48 | 14.78,5.73 14.78,3.98 15.78,2.98 15.78,1.98 R4.1 | 19.28,5.73 14.78,5.73 | v12.53,7.48 11.78,6.73 11.78,6.48 C6.1 | v14.03,6.23 14.53,5.73 14.78,5.73 | v32.53,10.23 31.78,10.23 C8.2 | v31.03,11.98 25.78,11.98 25.53,12.23 TP3.TP 25.28,12.48 v24.28,13.48 20.78,16.98 v20.78,18.73 | 35.78,22.48 40.28,22.48 | 40.28,22.48 44.03,22.48 44.78,23.23 C18.2 | 35.78,22.48 34.03,24.23 C23.2 | v40.53,30.73 42.53,30.73 42.78,30.98 42.78,31.73 C21.2 | 40.28,22.48 v40.28,22.23 | 35.78,22.48 v35.28,21.98
  Bottom 0.152: v7.53,26.73 6.03,28.23 v6.03,31.98 6.03,33.48 12.03,33.48 v15.03,30.48 15.78,29.73 v15.78,20.98 18.03,18.73 v20.78,18.73 | v12.53,7.48 14.03,7.48 v14.03,6.23 | 32.03,10.73 31.03,11.73 v31.03,11.98 | 32.03,10.73 v32.53,10.23 | v40.53,30.73 40.28,30.48 v40.28,22.23 | 32.03,10.73 35.28,13.98 v35.28,21.98 | v24.78,7.48 24.28,7.98 v24.28,13.48
  pour Bottom (isolate 0.3): 26.66,3.55 26.66,0.66 30.2,0.66 30.2,0.65 30.2,2.7 30.22,2.72 30.34,2.84 30.36,2.86 36.35,2.86 36.64,3.14 36.66,3.16 36.7,3.16 36.72,3.14 36.74,3.12 36.76,3.1 36.76,3.01 38.51,1.26 41.25,1.26 44.6,4.61 44.6,29.75 40.55,33.8 5.01,33.8 0.56,29.35 0.56,25.16 6.06,25.16 5.95,25.21 5.94,25.22 5.93,25.22 5.93,25.22 5.92,25.23 5.92,25.24 5.91,25.24 5.91,25.24 5.91,25.25 5.9,25.26 5.9,25.27 5.9,25.27 5.9,25.28 5.9,25.3 5.9,25.3 5.91,25.3 5.91,25.31 5.92,25.32 5.92,25.33 5.92,25.33 5.93,25.34 5.94,25.34 5.94,25.35 5.94,25.35 5.95,25.35 5.96,25.36 5.97,25.36 5.97,25.36 5.98,25.36 8.4,25.36 8.42,25.34 9.64,24.12 9.66,24.1 9.66,8.66 9.64,8.64 9.62,8.62 9.6,8.6 1.81,8.6 1.36,8.15 1.36,4.71 2.91,3.16 6.5,3.16 6.52,3.14 7.5,2.16 7.5,2.3 7.52,2.32 9.74,4.54 9.76,4.56 14.5,4.56 14.52,4.54 15.54,3.52 15.56,3.5 15.56,0.91 15.81,0.66 19.3,0.66 19.3,0.65 19.3,3 19.32,3.02 20.04,3.74 20.06,3.76 26.7,3.76 26.72,3.74 26.74,3.72 26.76,3.7 26.76,3.66 26.74,3.64
3V3/2.4A1  (1 unrouted)
3V3/2.4A3  (1 unrouted)
3V3/2.4A4  (via drill 0.35)  (3 unrouted)
  Top 0.152: v37.53,17.73 37.03,17.73 36.78,17.98 C27.2 | v39.28,28.48 40.28,29.48 42.78,29.48 43.78,30.48 C28.2 | v8.53,3.98 6.53,3.98 5.03,2.48 U$6.2
  Bottom 0.152: v39.28,28.48 37.78,26.98 37.78,17.98 v37.53,17.73 37.53,12.73 36.03,11.23 36.03,9.98 34.53,9.98 29.53,4.98 29.53,4.48 30.53,3.48 30.53,2.73 30.28,2.48 30.28,2.23 29.53,2.23 28.28,3.48 28.28,3.98 25.78,3.98 25.53,4.23 9.28,4.23 9.03,3.98 v8.53,3.98
DN  (via drill 0.35)
  Top 0.152: J3.A7 24.28,28.73 24.28,29.48 25.03,29.48 25.28,29.23 25.28,28.73 J3.B7 25.28,28.48 v25.28,27.48 | v24.78,23.23 24.03,22.48 D4.1
  Bottom 0.152: v24.78,23.23 25.28,23.73 v25.28,27.48
DP  (via drill 0.35)
  Top 0.152: 24.28,27.73 24.53,27.73 24.78,27.98 24.78,28.48 J3.A6 | 24.28,27.73 23.78,27.73 23.78,28.48 J3.B6 | v22.78,20.23 23.78,20.23 D4.3 | v22.53,24.23 22.53,26.73 23.28,26.73 24.28,27.73
  Bottom 0.152: v22.78,20.23 22.53,20.48 v22.53,24.23
EPD_3V3  (via drill 0.35)
  Top 0.152: v30.28,4.73 29.28,4.73 29.03,4.48 EPD_C5.2 28.78,4.48 28.53,4.73 v26.03,4.73 | v31.78,6.23 33.78,6.23 C30.1 | v40.03,6.23 40.28,5.98 43.03,5.98 L2.2 | 8.53,18.73 8.53,19.23 J2.16 | 8.53,18.73 9.03,18.73 v9.53,18.23 | v11.53,32.73 12.03,33.23 12.28,33.23 Q1.3 | 8.53,18.73 J2.15
  Route2 0.152: v31.78,6.23 v30.28,4.73
  Route15 0.152: v40.03,6.23 v31.78,6.23 | v26.03,4.73 25.28,4.73 21.28,8.73 12.53,8.73 v9.78,11.48
  Bottom 0.152: v11.53,32.73 11.03,32.23 11.03,25.23 12.03,24.23 12.03,20.73 v9.53,18.23 9.28,17.98 9.28,11.98 v9.78,11.48
GDR  (via drill 0.35)
  Top 0.152: v29.78,2.98 29.78,1.48 30.03,1.23 30.28,1.23 R7.2 | v14.78,24.23 13.78,24.23 Q2.1 | v11.53,12.48 11.28,12.23 8.53,12.23 J2.2
  Route2 0.152: v11.53,12.48 11.53,15.73 12.28,16.48 12.28,18.48 14.28,20.48 14.28,23.73 v14.78,24.23
  Route15 0.152: v28.78,21.48 24.28,25.98 16.53,25.98 v14.78,24.23
  Bottom 0.152: v29.78,2.98 27.53,5.23 27.53,20.23 v28.78,21.48
GND  (via drill 0.35)  (14 unrouted)
  Top 0.152: SW_UP.1 13.03,4.98 12.78,4.98 12.78,6.23 C6.2 12.78,6.48 13.28,6.98 | R14.2 21.53,6.48 21.03,6.98 19.03,6.98 TP_BAT_GND.TP 18.78,6.98 13.28,6.98 | 1.78,8.48 1.28,8.48 1.28,6.73 C33.1 | 7.28,6.98 5.78,8.48 EPD_C1.1 5.78,8.73 5.28,9.23 2.53,9.23 1.78,8.48 | 7.78,6.98 7.78,6.23 7.53,5.98 7.28,5.98 C20.1 | 7.28,6.98 7.78,6.98 | 7.28,6.98 R15.1 | 11.53,8.98 11.03,8.48 9.28,8.48 7.78,6.98 | 11.53,8.98 11.03,8.98 11.03,10.73 J2.MP1 11.28,10.98 12.28,11.98 12.28,18.23 | 1.78,8.48 C14.2 | 13.28,6.98 13.28,8.23 12.28,8.23 11.53,8.98 | 11.53,8.98 C11.2 | 34.28,24.73 35.03,23.98 36.28,23.98 IC2.B1 | 34.03,24.73 34.28,24.73 | 34.28,24.73 35.53,25.98 36.78,25.98 EPD_C12.1 | 30.78,24.98 30.78,26.23 31.78,26.23 SJ1.1 | 30.78,24.98 30.78,24.73 | 30.78,24.73 30.78,23.73 C35.1 30.53,23.48 30.53,21.73 30.03,21.73 29.78,21.48 29.78,19.98 U$2.P$75 | 30.78,24.98 25.53,24.98 | 25.53,24.98 25.28,24.98 24.53,25.73 D3.1 | 30.78,24.73 34.03,24.73 | 34.03,24.73 C23.1 | 18.78,23.23 19.03,23.48 U1.9 | 18.78,23.23 18.28,22.73 18.03,22.73 U1.4 17.78,22.73 17.28,22.23 16.78,22.23 | 18.78,23.23 19.78,23.23 U1.6 | 18.78,23.23 U1.9 | U1.1 18.03,24.23 18.53,24.23 19.03,23.73 U1.9 | 16.78,22.23 16.03,22.23 14.78,23.48 11.78,23.48 11.28,23.98 J2.MP2 | 17.53,19.48 17.53,18.73 14.03,18.73 C1.2 13.78,18.73 13.28,18.23 12.28,18.23 | 17.53,19.48 17.53,19.73 | 17.53,19.73 17.53,20.23 IC1.D2 | 11.28,17.48 12.03,18.23 12.28,18.23 | 11.28,17.48 9.03,15.23 8.53,15.23 J2.8 | 11.28,17.48 9.03,19.73 8.53,19.73 J2.17 | 17.53,19.48 21.03,19.48 21.53,18.98 EPD_C7.1 21.78,18.98 21.78,20.48 C3.2 21.78,20.73 22.03,20.98 23.53,20.98 23.78,21.23 D4.2 24.03,21.48 25.53,21.48 25.53,24.98
  Top 0.152: 16.78,22.23 16.78,19.73 17.53,19.73 | C16.2 40.03,22.98 40.28,23.23 v41.78,23.23 43.78,23.23 44.53,23.98 44.78,23.98 C18.1 | 37.78,9.73 36.78,9.73 | 36.78,9.73 35.78,9.73 34.53,8.48 C38.2 | 36.28,7.73 36.28,6.48 35.03,6.48 C30.2 35.03,6.23 35.28,6.23 35.28,4.98 SW_ENT.1 | 36.28,7.73 36.28,8.23 | v41.03,2.98 42.28,2.98 C29.1 | 36.28,7.73 v37.03,7.73 | 36.78,9.73 36.78,8.23 36.28,8.23 | 36.28,8.23 C13.2 | C36.1 43.78,17.98 43.78,15.98 TP10.TP 43.78,15.73 43.28,15.23 42.78,15.23 41.28,13.73 | 39.53,15.23 39.28,15.48 38.28,15.48 | 41.28,13.73 39.78,15.23 39.53,15.23 | 41.28,13.73 43.28,11.73 44.78,11.73 44.78,8.23 R10.1 | 39.53,15.23 C22.1 | 10.28,26.48 11.28,26.48 C37.1 | 10.28,26.48 8.78,26.48 C25.1 | v10.28,32.73 9.28,33.73 9.03,33.73 C19.1 | v10.03,30.48 10.03,28.98 EPD_C9.1 | 10.28,26.48 10.28,28.73 EPD_C9.1 | 5.28,30.23 5.28,31.48 | 5.28,31.48 5.28,32.98 C17.2 | 5.28,30.23 7.53,30.23 EPD_C10.1 | EPD_C8.1 5.78,25.98 5.78,28.73 5.28,28.73 3.53,30.48 EPD_C6.1 3.28,30.73 4.03,31.48 5.28,31.48 | 5.28,30.23 7.28,28.23 9.53,28.23 10.03,28.73 EPD_C9.1 | 33.28,19.73 33.53,19.48 35.53,19.48 36.53,18.48 C27.1 36.78,18.48 38.28,18.48 38.28,15.48 | 36.78,33.73 36.28,33.73 | 36.28,33.73 34.78,33.73 R1.1 34.53,33.73 33.28,33.73 32.53,32.98 C2.2 31.78,33.48 28.78,33.48 J3.SH1 | 36.78,33.73 39.78,33.73 39.78,30.48 40.28,29.98 42.28,29.98 43.28,30.98 43.78,30.98 C28.1 | 36.78,33.73 C7.1 | 36.28,33.73 36.28,31.73 C24.1 | 28.78,5.73 28.78,5.98 28.28,6.48 EPD_C11.1 28.03,6.48 27.28,5.73 24.28,5.73 | 28.78,5.73 28.78,4.98 EPD_C5.1 | R7.1 30.28,1.73 30.28,2.48 30.53,2.73 30.53,3.98 25.78,3.98 25.03,4.73 24.53,4.73 SW_DN.1 24.28,4.98 24.28,5.73
  Top 0.152: 24.28,5.73 24.28,6.48 C5.2 | 28.28,13.48 27.28,12.48 C12.2 | 29.53,13.48 28.28,13.48 | C32.2 29.53,13.48 | 29.53,13.48 33.03,13.48 33.03,12.98 C39.2 | EPD_C2.1 36.53,28.48 34.78,30.23 C26.1 34.53,30.23 33.78,29.48 30.53,29.48 | C8.1 31.78,10.73 30.78,10.73 C15.2 30.53,10.73 30.03,10.23 v29.53,10.23 | 16.78,33.48 17.03,33.48 IC3.8 | 16.78,33.48 16.53,33.48 IC3.9 | v16.78,32.73 16.78,33.48 | 30.53,29.48 30.28,29.23 28.78,29.23 J3.SH3 | 30.53,29.48 31.28,30.23 C4.1 | J3.SH4 20.03,28.98 18.28,28.98 17.78,28.48 U$3.2 17.53,28.48 17.28,28.48 16.28,29.48 U$3.4 | 28.28,13.48 28.28,15.23 29.03,15.23 29.03,16.23 29.53,16.23 U$2.P$87 | v28.28,5.73 28.78,5.73 | 33.28,19.73 U$2.P$74 | 33.28,19.73 U$2.P$78 | 37.78,9.73 37.78,15.48 38.28,15.48 | 37.78,9.73 C10.1 | 38.28,15.48 C9.1
  Route15 0.152: v10.28,32.73 11.03,33.48 16.03,33.48 v16.78,32.73
  Bottom 0.152: 40.78,3.23 37.03,6.98 v37.03,7.73 | v41.78,23.23 41.53,22.98 41.53,16.73 40.78,15.98 40.78,3.23 | 40.78,3.23 v41.03,2.98 | v10.28,32.73 10.03,32.48 v10.03,30.48 | v16.78,32.73 20.03,32.73 20.03,33.23 J3.SH2 | U$2.P$87 29.53,16.23 v29.53,10.23 29.53,6.98 v28.28,5.73
  pour Route2 (isolate 0.3): 15.34,3.22 15.36,3.2 15.36,0.86 19.55,0.86 19.8,1.11 19.8,4.6 19.82,4.62 20.14,4.94 20.16,4.96 26.1,4.96 26.12,4.94 26.84,4.22 26.86,4.2 26.86,0.86 30.41,0.86 30.4,0.86 30.4,3.3 30.42,3.32 30.44,3.34 30.46,3.36 37.35,3.36 37.44,3.44 37.46,3.46 37.5,3.46 37.52,3.44 37.54,3.42 37.56,3.4 37.56,1.26 41.15,1.26 44.3,4.41 44.3,5 44.32,5.02 44.9,5.61 44.9,28.45 43.72,29.64 43.7,29.66 43.7,30.55 40.15,34.1 4.51,34.1 4.26,33.85 4.26,33.06 4.24,33.04 0.46,29.25 0.46,24.96 6.73,24.96 5.95,25.31 5.94,25.32 5.94,25.32 5.93,25.32 5.93,25.33 5.92,25.34 5.91,25.34 5.91,25.34 5.91,25.35 5.9,25.36 5.9,25.37 5.9,25.37 5.9,25.38 5.9,25.4 5.9,25.4 5.9,25.4 5.91,25.41 5.92,25.42 5.92,25.42 5.92,25.43 5.93,25.43 5.94,25.44 5.94,25.45 5.94,25.45 5.95,25.45 5.96,25.46 5.97,25.46 5.97,25.46 5.98,25.46 6.3,25.46 6.32,25.44 6.51,25.26 7.5,25.26 7.52,25.24 8.24,24.52 8.26,24.5 8.26,9.36 8.24,9.34 8.22,9.32 8.2,9.3 0.66,9.3 0.66,5.21 5.01,0.86 7.9,0.86 7.72,1.04 7.7,1.06 7.7,3.3 7.72,3.32 7.74,3.34 7.76,3.36 15.2,3.36 15.22,3.34
IMU_INT2  (1 unrouted)
LX1  (1 unrouted)
  Top 0.152: IC2.B2 36.78,23.98 37.03,23.98 IC2.B3
LX2  (via drill 0.35)
  Top 0.152: 37.03,23.23 36.78,23.23 IC2.D2 | v39.28,23.23 37.03,23.23 | v6.53,5.48 5.28,6.73 4.78,6.73 L1.2 | 37.03,23.23 IC2.D3
  Route2 0.152: v39.28,23.23 39.28,21.23 27.03,8.98 19.28,8.98 18.78,8.48 9.53,8.48 v6.53,5.48
N$1  (1 unrouted)
N$2  (via drill 0.35)
  Top 0.152: v27.28,3.23 26.78,3.23 26.78,1.73 R6.1 | v15.03,31.48 15.53,31.98 16.03,31.98 IC3.1
  Route15 0.152: v27.28,3.23 27.28,6.73 24.78,9.23 21.28,9.23 20.78,9.73 20.78,10.48 22.28,11.98 22.28,18.23 20.28,20.23 v18.53,20.23
  Bottom 0.152: v18.53,20.23 17.53,21.23 17.53,30.73 16.28,31.98 15.03,31.98 v15.03,31.48
N$3  (1 unrouted)
N$4  (1 unrouted)
N$5
  Top 0.152: U$6.1 4.03,2.23 4.53,1.73 6.28,1.73 7.03,2.48 7.53,2.48 8.28,1.73 U$5.2
N$7  (via drill 0.35)
  Top 0.152: v10.03,14.73 9.03,13.73 8.53,13.73 J2.5 | v36.03,29.98 37.53,28.48 EPD_C2.2
  Route15 0.152: v11.28,18.98 11.28,21.48 12.03,22.23 12.03,24.23 11.78,24.48 11.78,25.48 14.28,27.98 14.28,29.23 14.78,29.73 15.78,29.73 18.53,32.48 30.03,32.48 30.28,32.73 33.28,32.73 v36.03,29.98
  Bottom 0.152: v10.03,14.73 10.03,17.73 v11.28,18.98
N$8  (via drill 0.35)  (1 unrouted)
  Top 0.152: U$4.2 14.78,8.73 21.28,8.73 23.53,10.98 30.28,10.98 30.53,11.23 C15.1 30.78,11.23 34.53,11.23 v35.03,10.73 | v38.78,30.48 38.78,31.73 ANT1.1
  Bottom 0.152: v38.78,30.48 36.53,28.23 36.53,12.23 v35.03,10.73
N$9  (via drill 0.35)
  Top 0.152: v24.78,16.98 26.03,16.98 26.03,17.98 C31.2 | v16.78,24.23 16.28,23.73 16.03,23.73 Q2.3 | v43.28,27.48 44.03,28.23 D2.2 | v40.03,7.23 38.78,5.98 38.53,5.98 L2.1
  Route15 0.152: v16.78,24.23 17.03,24.23 24.28,16.98 v24.78,16.98 27.28,16.98 29.53,14.73 38.53,14.73 v39.28,13.98
  Bottom 0.152: v43.28,27.48 41.03,25.23 41.03,16.73 40.03,15.73 40.03,13.98 | v40.03,7.23 40.03,13.98 | 40.03,13.98 v39.28,13.98
N$10  (1 unrouted)
  Top 0.152: C13.1 36.28,8.73 35.28,8.73 34.28,7.73 26.03,7.73 24.78,8.98 22.03,8.98 21.28,8.23 15.28,8.23 15.03,7.98 14.28,7.98 13.78,8.48 U$4.1
N$11  (via drill 0.35)
  Top 0.152: v25.28,18.98 25.28,18.23 C31.1 | v26.53,25.73 27.78,25.73 D3.2 | v35.78,25.23 40.53,25.23 40.78,25.48 D1.1
  Bottom 0.152: v25.28,18.98 26.53,20.23 26.53,25.23 | v26.53,25.73 26.53,25.23 | 26.53,25.23 v35.78,25.23
N$12  (via drill 0.35)
  Top 0.152: v21.53,17.98 22.53,17.98 22.53,18.73 EPD_C7.2 | v15.03,20.23 14.78,19.98 12.78,19.98 12.53,19.73 11.03,19.73 10.28,20.48 9.53,20.48 9.28,20.73 8.53,20.73 J2.19
  Route15 0.152: v21.53,17.98 20.28,17.98 18.78,19.48 17.03,19.48 16.28,20.23 v15.03,20.23
N$13  (via drill 0.35)
  Top 0.152: v10.03,19.73 9.78,19.73 9.28,20.23 8.53,20.23 J2.18 | v9.53,27.23 9.03,27.73 7.28,27.73 4.53,30.48 EPD_C6.2
  Bottom 0.152: v10.03,19.73 10.53,20.23 10.53,26.23 v9.53,27.23
N$14  (1 unrouted)
N$15  (via drill 0.35)  (1 unrouted)
  Top 0.152: v12.28,10.23 11.53,9.48 C11.1 | v13.28,27.98 13.53,28.23 16.03,28.23 U$3.1
  Bottom 0.152: v12.28,10.23 12.78,10.73 12.78,23.98 13.28,24.48 v13.28,27.98
N$16  (via drill 0.35)  (1 unrouted)
  Top 0.152: v26.28,13.73 27.03,12.98 C12.1 | v24.03,30.23 23.03,31.23 20.03,31.23 18.53,29.73 17.78,29.73 U$3.3
  Bottom 0.152: v26.28,13.73 24.03,15.98 v24.03,30.23
N$17  (via drill 0.35)
  Top 0.152: v12.53,24.73 10.78,24.73 10.28,24.23 9.53,24.23 8.53,23.23 J2.24 | v34.78,26.98 35.03,26.73 37.03,26.73 37.78,25.98 EPD_C12.2
  Route15 0.152: v12.53,24.73 13.78,24.73 17.28,28.23 33.53,28.23 v34.78,26.98
N$18  (1 unrouted)
  Top 0.152: R8.1 29.53,26.98 30.03,27.48 32.78,27.48 33.78,26.48 SJ1.2
N$19  (1 unrouted)
N$20  (via drill 0.35)
  Top 0.152: v9.78,10.48 8.78,10.48 7.03,8.73 EPD_C1.2 | v10.53,13.48 10.28,13.23 8.53,13.23 J2.4
  Bottom 0.152: v9.78,10.48 10.53,11.23 v10.53,13.48
N$21  (1 unrouted)
N$22  (via drill 0.35)
  Top 0.152: v9.53,24.98 8.78,24.98 8.03,25.73 7.03,25.73 EPD_C8.2 | v9.78,22.73 10.53,21.98 10.53,20.98 9.53,20.98 9.28,21.23 8.53,21.23 J2.20
  Bottom 0.152: v9.53,24.98 9.78,24.73 v9.78,22.73
N$23  (via drill 0.35)
  Top 0.152: 10.28,6.48 10.03,6.73 R12.1 | 10.28,6.48 10.28,4.98 SW_UP.2 | v32.78,23.48 31.78,23.48 C35.2 | v10.78,6.73 10.53,6.48 10.28,6.48
  Route2 0.152: v25.28,6.48 23.28,4.48 21.03,4.48 20.03,5.48 12.03,5.48 v10.78,6.73
  Bottom 0.152: v32.78,23.48 27.03,23.48 27.03,8.23 v25.28,6.48
N$24  (via drill 0.35)
  Top 0.152: v11.28,22.48 10.28,23.48 9.53,23.48 9.28,23.23 9.03,23.23 9.03,22.23 8.53,22.23 J2.22 | v7.53,28.98 8.53,29.98 EPD_C10.2
  Route15 0.152: v11.28,22.48 11.28,24.48 7.53,28.23 v7.53,28.98
N$25  (via drill 0.35)
  Top 0.152: v10.53,7.73 10.03,7.73 8.78,6.48 R11.1 | v30.03,6.48 31.03,5.48 31.78,5.48 32.28,4.98 SW_ENT.2 | v43.78,19.23 44.53,19.23 44.53,18.23 C36.2
  Route15 0.152: v21.53,9.98 26.53,9.98 29.03,7.48 | v30.03,6.48 29.03,7.48 | v43.78,19.23 43.78,16.98 34.28,7.48 29.03,7.48
  Bottom 0.152: v10.53,7.73 10.03,7.23 10.03,6.48 11.03,5.48 20.03,5.48 20.03,8.48 v21.53,9.98
N$26  (via drill 0.35)
  Top 0.152: v7.28,31.98 7.03,31.98 7.03,32.98 7.28,33.23 R13.1 | v12.53,28.73 12.53,26.48 C37.2 12.53,26.23 19.03,26.23 v20.03,25.23 | v20.78,5.73 21.28,5.73 21.28,4.98 SW_DN.2
  Route2 0.152: v7.28,31.98 10.53,28.73 v12.53,28.73
  Bottom 0.152: v20.78,5.73 22.28,7.23 22.28,19.73 20.03,21.98 v20.03,25.23
N$27  (via drill 0.35)
  Top 0.152: v23.03,8.23 21.78,6.98 R14.1 | v23.03,27.48 22.78,27.73 22.78,28.48 J3.B5
  Bottom 0.152: v23.03,8.23 23.53,8.73 23.53,26.98 v23.03,27.48
N$30  (1 unrouted)
N$36  (via drill 0.35)
  Top 0.152: v6.53,6.48 7.28,6.48 R15.2 | v25.03,30.23 25.78,29.48 25.78,28.73 J3.A5
  Route2 0.152: v6.53,6.48 7.03,6.48 12.78,12.23 12.78,17.23 14.53,18.98 15.53,18.98 15.78,18.73 18.28,18.73 26.28,26.73 26.53,26.73 27.03,27.23 27.03,27.73 25.03,29.73 v25.03,30.23
OUT+  (1 unrouted)
OUT-  (1 unrouted)
P0.00/XL1  (1 unrouted)
  Top 0.152: C9.2 38.28,14.98 38.28,11.23 39.53,11.23 U$1.1
P1.01/1.6C  (via drill 0.35)
  Top 0.152: v40.03,2.48 40.28,2.23 41.03,2.23 R9.1 | v15.03,28.98 14.53,29.48 13.03,29.48 11.28,31.23 Q1.1
  Route15 0.152: v40.03,2.48 40.03,5.23 44.53,9.73 44.53,19.48 32.78,31.23 20.03,31.23 17.78,28.98 v15.03,28.98
P.01/XL2  (1 unrouted)
  Top 0.152: C10.2 37.78,9.23 40.28,9.23 42.03,10.98 U$1.2
PMIC_INT  (1 unrouted)
PREVGH  (via drill 0.35)
  Top 0.152: v9.78,21.73 8.53,21.73 J2.21 | v11.78,27.23 11.78,28.73 11.28,28.73 EPD_C9.2 | v26.28,27.48 28.78,27.48 29.28,27.98 32.78,27.98 33.03,27.73 40.03,27.73 40.53,28.23 D2.1
  Route2 0.152: v9.78,21.73 10.53,22.48 10.53,25.98 11.28,26.73 | v11.78,27.23 11.28,26.73 | v26.28,27.48 25.53,26.73 11.28,26.73
PREVGL  (via drill 0.35)  (1 unrouted)
  Top 0.152: v31.28,4.73 30.53,5.48 29.28,5.48 29.28,6.48 EPD_C11.2 | v38.53,23.98 38.78,24.23 43.03,24.23 44.28,25.48 D1.2
  Bottom 0.152: v31.28,4.73 38.53,11.98 v38.53,23.98
RESE  (via drill 0.35)
  Top 0.152: v21.03,23.48 23.28,23.48 23.28,26.23 23.53,26.48 29.28,26.48 R8.2 | v15.03,22.23 14.53,22.73 13.78,22.73 Q2.2 | v11.53,16.73 11.53,13.48 10.78,12.73 8.53,12.73 J2.3
  Route2 0.152: v21.03,23.48 20.03,22.48 17.28,22.48 17.03,22.23 15.53,22.23 | v15.03,22.23 15.53,22.23 | v11.53,16.73 11.53,18.23 13.78,20.48 13.78,24.23 14.53,24.98 15.03,24.98 15.53,24.48 15.53,22.23
RESET  (2 unrouted)
SCL/1.4C  (1 unrouted)
SCL/2.4C  (via drill 0.35)  (2 unrouted)
  Top 0.152: v16.28,3.48 16.28,1.98 15.78,1.48 R4.2 | v41.53,9.23 41.78,8.98 43.53,8.98 44.03,8.48 44.03,5.73 44.28,5.73 R2.1 | v15.28,32.73 15.53,32.48 16.03,32.48 IC3.12 | v41.53,15.73 41.03,15.73 40.28,16.48 TP1.TP
  Route2 0.152: v15.28,32.73 15.78,32.73 17.53,30.98 v18.28,30.98
  Route15 0.152: v16.28,3.48 20.03,3.48 20.78,4.23 25.28,4.23 27.03,2.48 27.53,2.48 29.53,4.48 29.53,4.98 31.53,6.98 38.78,6.98 41.03,9.23 v41.53,9.23
  Bottom 0.152: v18.28,30.98 18.53,31.23 18.53,31.73 19.03,32.23 19.53,32.23 19.78,31.98 36.78,31.98 37.03,32.23 42.78,32.23 42.78,29.98 44.53,28.23 44.53,12.23 42.53,10.23 | v41.53,9.23 42.53,10.23 | v41.53,15.73 42.53,14.73 42.53,10.23
SDA/1.4C  (1 unrouted)
SDA/2.4C  (via drill 0.35)  (4 unrouted)
  Top 0.152: v16.03,31.23 16.53,31.23 16.53,31.98 IC3.2 | v28.78,9.48 28.53,9.23 26.78,9.23 TP4.TP
  Route15 0.152: v16.78,25.23 24.28,17.73 27.03,17.73 29.53,15.23 39.03,15.23 40.03,14.23 40.03,13.73 35.78,9.48 v28.78,9.48
  Bottom 0.152: v16.03,31.23 16.78,30.48 v16.78,25.23
SWDCLK  (2 unrouted)
SWDIO  (2 unrouted)
SWO  (1 unrouted)
VBAT/1.2A  (via drill 0.35)
  Top 0.152: v5.03,8.48 4.03,8.48 3.78,8.73 C34.2 | v16.78,22.98 17.03,23.23 17.78,23.23 U1.3 18.03,23.23 18.03,23.73 U1.2 | v31.28,21.98 34.03,21.98 34.78,21.23 36.03,21.23 36.28,21.48 42.28,21.48 43.03,20.73 TP_VBAT.TP
  Route15 0.152: v5.03,8.48 6.78,8.48 9.03,10.73 9.03,15.23 14.03,20.23 | v16.78,22.98 14.03,20.23 | v31.28,21.98 26.78,26.48 16.03,26.48 14.03,24.48 14.03,20.23
VBAT/2.5C  (1 unrouted)
VBUS/1.5D  (via drill 0.35)
  Top 0.152: 34.78,13.23 33.53,11.98 33.03,11.98 32.28,12.73 C39.1 | 34.78,13.23 35.03,13.48 37.28,13.48 37.28,11.48 36.53,10.73 36.03,10.73 34.53,9.23 C38.1 | v27.78,21.48 26.53,21.48 D4.5 | 34.78,13.23 v34.03,13.98
  Bottom 0.152: v27.78,21.48 29.03,22.73 34.03,22.73 v34.03,13.98
VBUS/2.6D  (via drill 0.35)  (1 unrouted)
  Top 0.152: v18.28,21.73 17.78,21.73 17.53,21.48 IC1.A2 | v16.03,19.48 13.28,19.48 12.78,18.98 C1.1 | v12.53,31.98 9.03,31.98 9.03,33.23 C19.2
  Route2 0.152: v16.03,19.48 v18.28,21.73
  Bottom 0.152: v12.53,31.98 14.03,30.48 14.03,20.23 14.78,19.48 v16.03,19.48
VBUS/2.6D1  (1 unrouted)
VREG  (via drill 0.35)
  Top 0.152: 36.78,31.48 36.78,30.73 32.78,30.73 32.53,30.48 C4.2 | 36.78,31.48 36.78,33.23 C7.2 | 36.78,24.48 36.28,24.48 IC2.A1 | 36.78,24.48 37.03,24.48 | 36.78,24.48 IC2.A2 | v19.28,20.98 17.53,20.98 IC1.B2 | v19.28,31.48 19.78,31.98 30.53,31.98 31.28,32.73 C2.1 | 37.03,24.48 37.28,24.73 41.28,24.73 41.78,25.23 v41.78,26.98 | 37.03,24.48 IC2.A3 | v43.28,14.48 43.78,14.48 43.78,13.23 TP2.TP | v37.28,31.48 36.78,31.48
  Bottom 0.152: v19.28,20.98 v19.28,31.48 v37.28,31.48 40.78,31.48 41.28,30.98 41.28,30.48 | v41.78,26.98 41.28,27.48 41.28,30.48 | v43.28,14.48 43.03,14.73 43.03,26.23 44.03,27.23 44.03,27.73 41.28,30.48